# Altium PCB Mppt_PCB_Final.PcbDoc
Units mil, origin at the board's own origin, x right, y up, seen from the top; angles counter-clockwise.
Board outline 3025 x 2630 mil, 2 copper layers (Top Layer, Bottom Layer); 89 components, 51 nets, 307 pads, 52 vias.
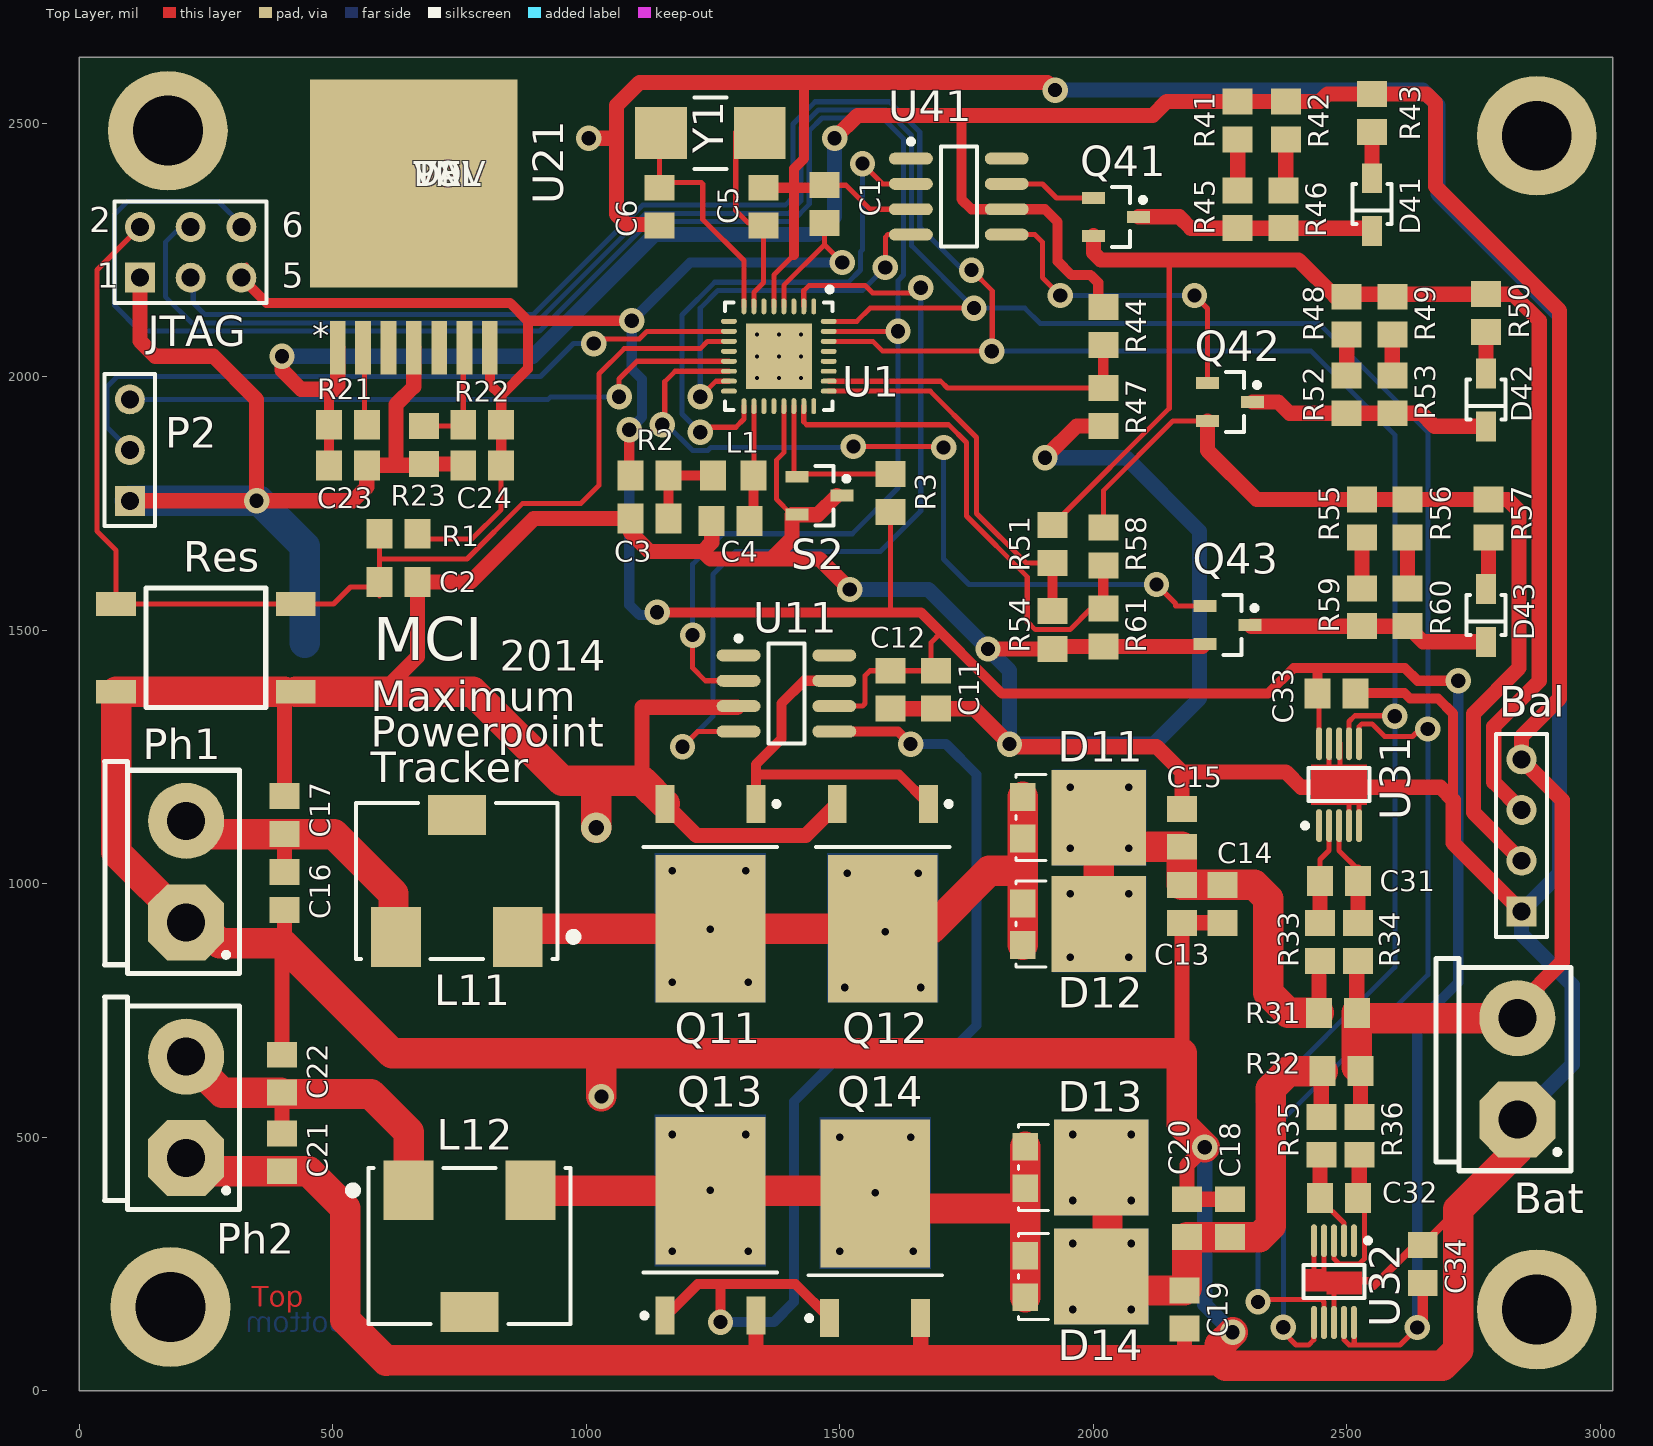
[diagram p0: Top Layer view]
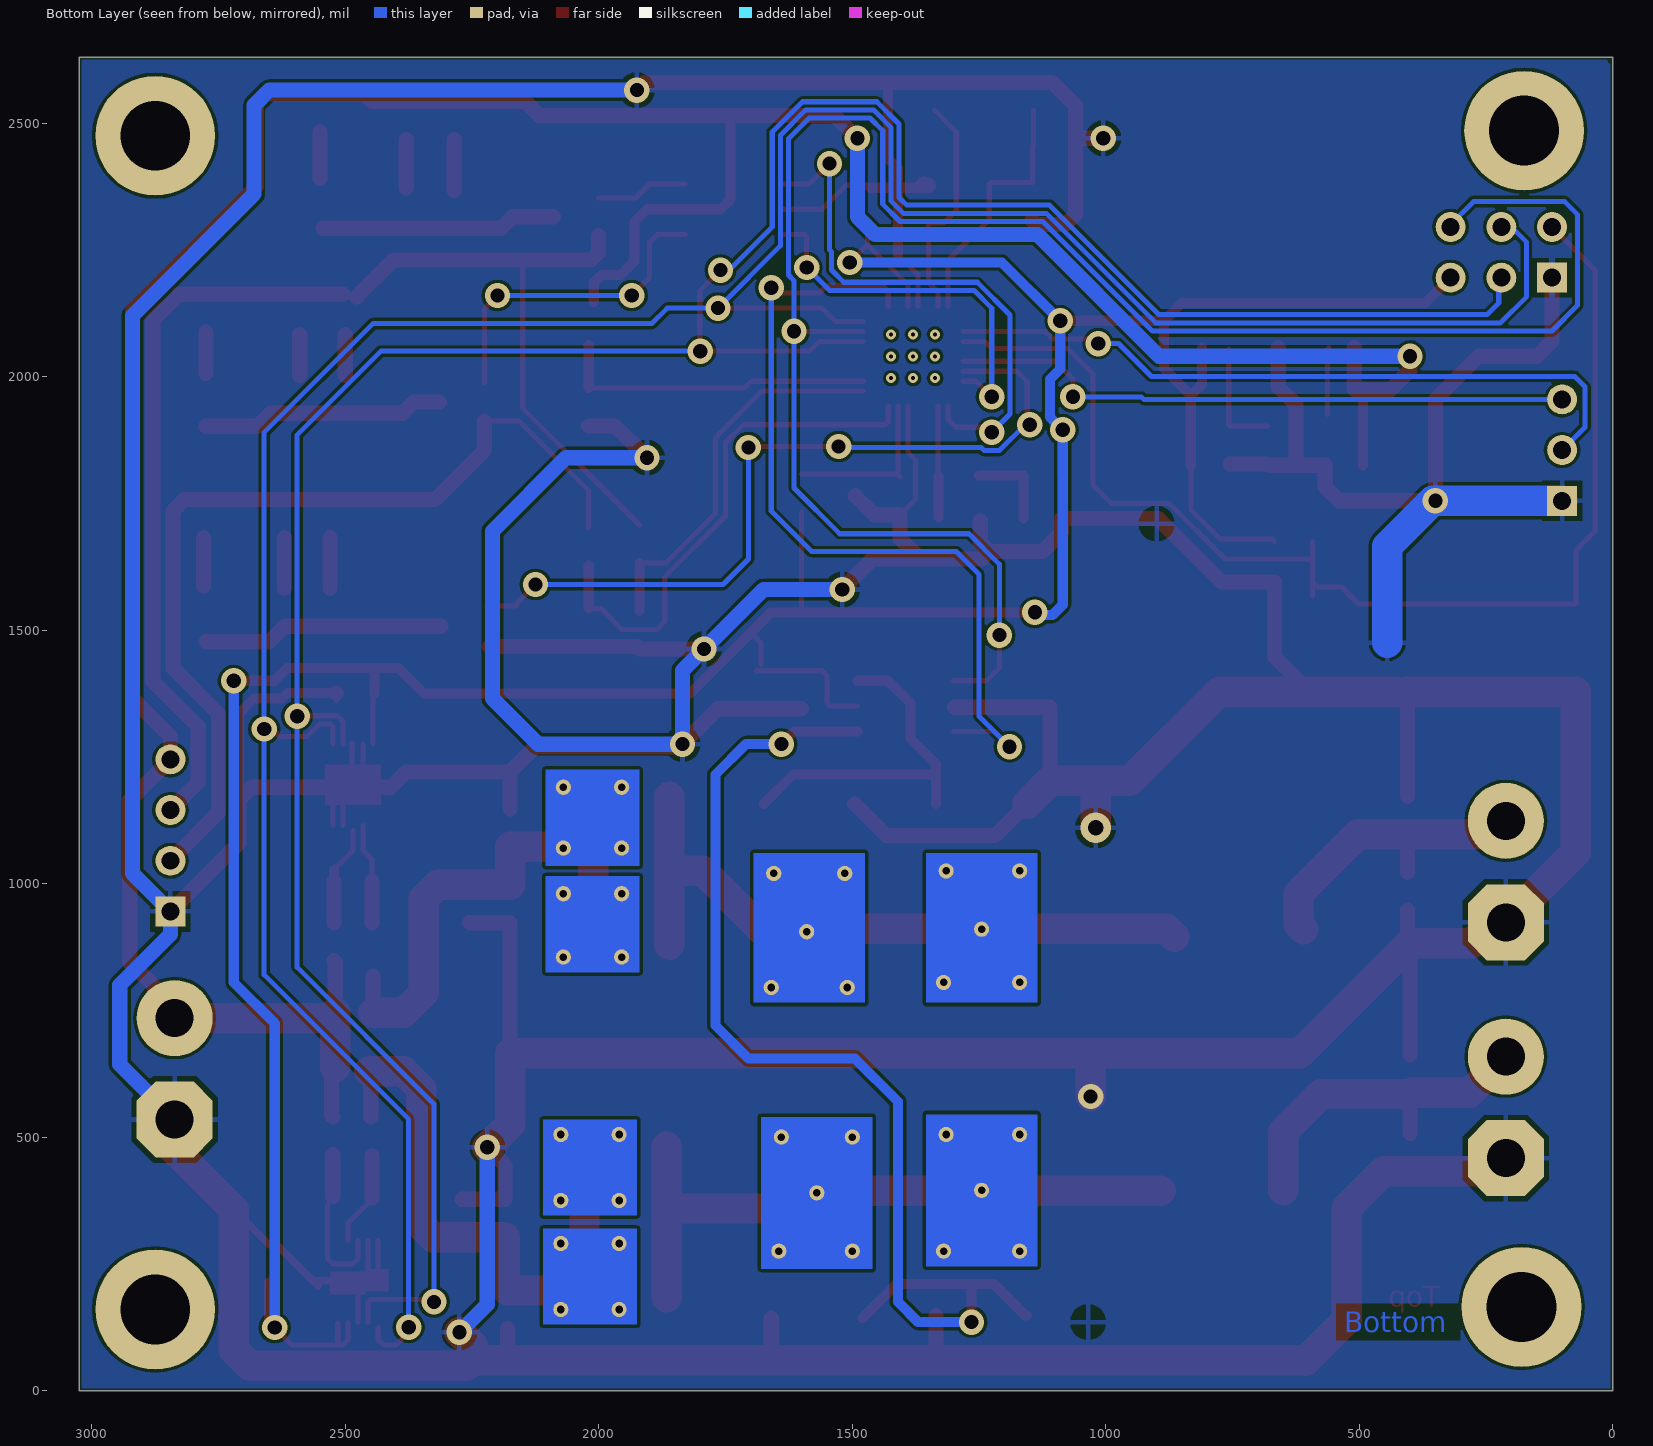
[diagram p1: Bottom Layer view, seen from below]
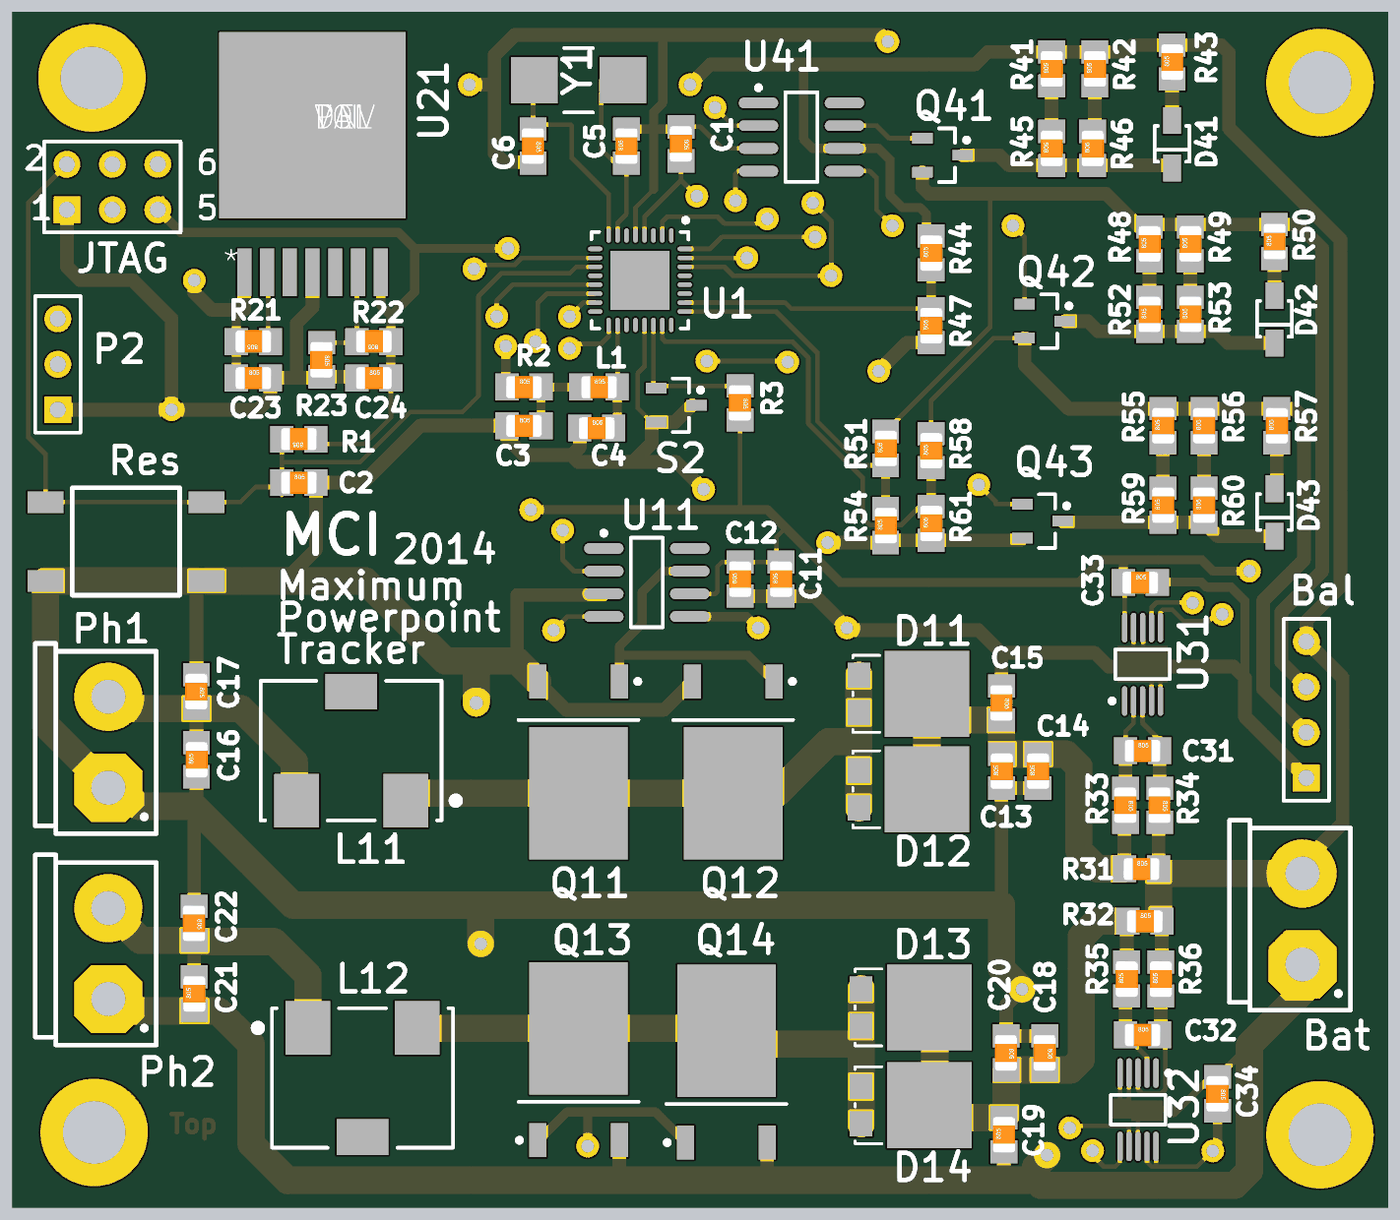
[diagram p2: 3D render of the assembled board from above, using the file's embedded part models]

## Layer stack, top to bottom
Top Solder: solder mask 0.4, Solder Resist, Dk 3.5
Top Layer: signal copper 1.4
Dielectric1: dielectric 12.6, FR-4, Dk 4.8
Bottom Layer: signal copper 1.4
Bottom Solder: solder mask 0.4, Solder Resist, Dk 3.5

## Board outline
0,0 3025,0 3025,2630 0,2630

## Design rules (kind name [scope] priority, off if disabled: settings)
Clearance Clearance_uC [InNetClass('uC')] p1: gap=6
Clearance [All] p2: gap=10
PolygonConnect [All] p1: connectstyle=Relief reliefconductorwidth=10 reliefentries=4 polygonreliefangle="90 Angle" airgapwidth=10
RoutingVias [All] p1: holewidth=28 width=50 viastyle="Through Hole" minholewidth=28 minwidth=50 maxholewidth=28 maxwidth=50
ShortCircuit ShortCircuit_GND [InNet('GND')] p1: allowed=TRUE
ShortCircuit [All] p2: allowed=FALSE
SolderMaskExpansion [All] p1: expansion=4
Width Width_uC [InNetClass('uC')] p1: maxlimit=60 minlimit=10 preferedwidth=10
Width Width_Power [InNetClass('Power')] p2: maxlimit=60 minlimit=30 preferedwidth=30
Width [All] p3: maxlimit=40 minlimit=10 preferedwidth=10
28 further rules are at their usual default settings.

## Classes and differential pairs
net class uC: +5V GND NetC2_1 NetC3_2 NetC4_2 NetC5_1 NetC6_1 NetC23_1 NetC31_1 NetC31_2 NetC32_1 NetC32_2 NetP1_3 NetP1_4 NetP1_6 NetP2_2 NetP2_3 NetQ41_1 NetQ42_1 NetQ43_1 NetR3_1 NetR44_1 NetR51_1 NetR58_1 NetU1_2 NetU1_15 NetU1_17 NetU31_1 NetU32_1
net class Power: GND NetC13_2 NetC16_2 NetC18_2 NetC21_2 NetC23_1 NetD11_A1 NetD13_A1
component class Mppt_Sheet1: C1 C2 C3 C4 C5 C6 JTAG L1 P2 R1 R2 R3 Res S2 U1 Y1
component class CurrentSensor: Bat C31 C32 C33 C34 R31 R32 R33 R34 R35 R36 U31 U32
component class Buck: C23 C24 R21 R22 R23 U21
component class Boost: C11 C12 C13 C14 C15 C16 C17 C18 C19 C20 C21 C22 D11 D12 D13 D14 L11 L12 Ph1 Ph2 Q11 Q12 Q13 Q14 U11
component class Balancer: Bal D41 D42 D43 Q41 Q42 Q43 R41 R42 R43 R44 R45 R46 R47 R48 R49 R50 R51 R52 R53 R54 R55 R56 R57 R58 R59 R60 R61 U41

## Components (designator, comment, footprint, x,y, rotation, side; value= is the part's Value field where it differs from the comment)
Bal "Header 4" HDR1X4 2845,945 r90 top (schematic designator P41)
Bat "WRTBL_2P_508" WRTBL_2P_508 2845,635 r90 top (schematic designator P31)
C1 "Cap_cer_100n_50V" _0805#1 1470,2340 r270 top
C2 "Cap_cer_10n_50V" _0805#1 630,1595 r0 top
C3 "Cap_cer_100n_50V" _0805#1 1125,1720 r0 top
C4 "Cap_cer_100n_50V" _0805#1 1285,1715 r0 top
C5 "Cap_cer_12p_50V" _0805#1 1350,2335 r90 top
C6 "Cap_cer_12p_50V" _0805#1 1145,2335 r270 top
C11 "Cap_cer_4.7u_50V" _0805#1 1690,1382.4 r90 top
C12 "Cap_cer_100n_50V" _0805#1 1600,1382.4 r90 top
C13 "" _0805#1 2175,960 r90 top
C14 "Cap_cer_22µ_25V" _0805#1 2255,960 r90 top
C15 "Cap_cer_100n_50V" _0805#1 2175,1110 r270 top
C16 "Cap_cer_22µ_25V" _0805#1 405,985 r90 top
C17 "Cap_cer_100n_50V" _0805#1 405,1135 r270 top
C18 "Cap_cer_22µ_25V" _0805#1 2270,340 r270 top
C19 "Cap_cer_22µ_25V" _0805#1 2180,160 r90 top
C20 "Cap_cer_100n_50V" _0805#1 2185,340 r270 top
C21 "Cap_cer_22µ_25V" _0805#1 400,470 r90 top
C22 "Cap_cer_100n_50V" _0805#1 400,625 r270 top
C23 "Cap_cer_10n_50V" _0805#1 530,1825 r0 top
C24 "Cap_cer_100n_50V" _0805#1 795,1825 r0 top
C31 "Cap_cer_100n_50V" _0805#1 2485,1005 r0 top
C32 "Cap_cer_100n_50V" _0805#1 2485,380 r0 top
C33 "Cap_cer_100n_50V" _0805#1 2480,1375 r0 top
C34 "Cap_cer_100n_50V" _0805#1 2650,250 r270 top
D11 "V10P45S" TO-277A 1970,1130 r270 top
D12 "V10P45S" TO-277A 1970,920 r270 top
D13 "V10P45S" TO-277A 1975,440 r270 top
D14 "V10P45S" TO-277A 1975,225 r270 top
D41 "LED_SMD" LED_SMD 2550,2340 r90 top
D42 "LED_SMD" LED_SMD 2775,1955 r90 top
D43 "LED_SMD" LED_SMD 2775,1530 r90 top
JTAG "Header 3X2" HDR2X3 120,2195 r0 top (schematic designator P1)
L1 "IND_47u_0A055" COIL_0805 1290,1805 r0 top
L11 "HCF1007" HCF1007 745,1005 r180 top
L12 "HCF1007" HCF1007 770,285 r0 top
P2 "Header 3" HDR1X3 100,1755 r90 top
Ph1 "WRTBL_2P_508" WRTBL_2P_508 219.49,1023.9 r90 top (schematic designator P11)
Ph2 "WRTBL_2P_508" WRTBL_2P_508 219.49,558.9 r90 top (schematic designator P12)
Q11 "IRFR024N" TO-252AA_N 1245,980 r270 top
Q12 "IRFR024N" TO-252AA_N 1585,980 r270 top
Q13 "IRFR024N" TO-252AA_N 1245,325 r90 top
Q14 "IRFR024N" TO-252AA_N 1570,320 r90 top
Q41 "NMOS-2" SOT23_N 2045,2315 r0 top
Q42 "NMOS-2" SOT23_N 2270,1950 r0 top
Q43 "NMOS-2" SOT23_N 2265,1510 r0 top
R1 "Res_0805" _0805#1 630,1690 r180 top
R2 "Res_0805" _0805#1 1125,1805 r0 top
R3 "Res_0805" _0805#1 1600,1770 r270 top
R21 "Res_0805" _0805#1 530,1905 r180 top
R22 "Res_0805" _0805#1 795,1905 r180 top
R23 "Res_0805" _0805#1 680,1865 r270 top
R31 "Res_0805" _0805#1 2482.6,745 r0 top
R32 "Res_0805" _0805#1 2490,630 r0 top
R33 "Res_0805" _0805#1 2447.6,885 r270 top
R34 "Res_0805" _0805#1 2522.6,885 r270 top
R35 "Res_0805" _0805#1 2450,502.6 r90 top
R36 "Res_0805" _0805#1 2525,502.6 r90 top
R41 "Res_0805" _0805#1 2285,2505 r90 top
R42 "Res_0805" _0805#1 2380,2505 r90 top
R43 "Res_0805" _0805#1 2550,2520 r90 top
R44 "Res_0805" _0805#2 2020,2100 r90 top
R45 "Res_0805" _0805#1 2285,2330 r90 top
R46 "Res_0805" _0805#1 2375,2330 r90 top
R47 "Res_0805" _0805#1 2020,1940 r90 top
R48 "Res_0805" _0805#1 2500,2120 r90 top
R49 "Res_0805" _0805#1 2590,2120 r90 top
R50 "Res_0805" _0805#1 2775,2125 r90 top
R51 "Res_0805" _0805#1 1920,1670 r90 top
R52 "Res_0805" _0805#1 2500,1965 r90 top
R53 "Res_0805" _0805#1 2590,1965 r90 top
R54 "Res_0805" _0805#1 1920,1500 r90 top
R55 "Res_0805" _0805#1 2530,1720 r90 top
R56 "Res_0805" _0805#1 2620,1720 r90 top
R57 "Res_0805" _0805#1 2780,1720 r90 top
R58 "Res_0805" _0805#1 2020,1665 r90 top
R59 "Res_0805" _0805#1 2530,1545 r90 top
R60 "Res_0805" _0805#1 2620,1545 r90 top
R61 "Res_0805" _0805#1 2020,1505 r90 top
Res "Reset" SWITCH_SMD 250,1465 r0 top (schematic designator S1)
S2 "ZRC400" SOT23_N 1460,1765 r0 top
U1 "ATtiny26L-8MU" 32M1-A_N 1380,2040 r270 top
U11 "MAX4427ESA" NSO8_N 1395,1375 r0 top
U21 "LMZ12001_NDW_7" TZA07A 660,2375 r0 top
U31 "MAX9611AUB+" MAXM-U10+2_N 2485,1195 r90 top
U32 "MAX9611AUB+" MAXM-U10+2_N 2475,215 r270 top
U41 "MAX4427ESA" NSO8_N 1735,2355 r0 top
Y1 "Crystal_16.0MHz" XTAL_SMD 1245,2480 r0 top

## Footprints (in the part's own frame and the unit in brackets; to place one, negate y for a bottom-side part, rotate by r counter-clockwise, add the part's x,y. Pads: shape width x height; smd on the part's side, far side on the other; paste and mask are expansions set on the pad)
32M1-A_N [mm] "QFN, 32-Leads, Body 5x5mm, Pitch 0.5mm, Thermal Pad 3.3x3.3mm, IPC Medium Density"
  oval 0.8x0.25 smd: 1(-2.5,1.75) 2(-2.5,1.25) 3(-2.5,0.75) 4(-2.5,0.25) 5(-2.5,-0.25) 6(-2.5,-0.75) 7(-2.5,-1.25) 8(-2.5,-1.75) 17(2.5,-1.75) 18(2.5,-1.25) 19(2.5,-0.75) 20(2.5,-0.25) 21(2.5,0.25) 22(2.5,0.75) 23(2.5,1.25) 24(2.5,1.75)
  oval 0.25x0.8 smd: 9(-1.75,-2.5) 10(-1.25,-2.5) 11(-0.75,-2.5) 12(-0.25,-2.5) 13(0.25,-2.5) 14(0.75,-2.5) 15(1.25,-2.5) 16(1.75,-2.5) 25(1.75,2.5) 26(1.25,2.5) 27(0.75,2.5) 28(0.25,2.5) 29(-0.25,2.5) 30(-0.75,2.5) 31(-1.25,2.5) 32(-1.75,2.5)
  rect 3.3x3.3 smd: 33(0,0)
  silkscreen extent -3.47,-2.7 2.7,2.7, body extent -2.55,-2.55 2.55,2.55, height 1
_0805#1 [mm]
  rect 1.3x1.5 smd: 1(-0.95,0) 2(0.95,0)
  body extent -1,-0.64 1,0.62, height 0.78
_0805#2 [mm]
  rect 1.3x1.5 smd: 1(-0.95,0)
  rect 1.295x1.499 smd: 2(0.95,0)
  body extent -1,-0.64 1,0.62, height 0.78
COIL_0805 [mm]
  rect 1.3x1.5 smd: 1(-1.014,0) 2(1.014,0)
  body extent -1,-0.64 1,0.62, height 0.78
HCF1007 [mm]
  rect 2.5x3 smd: 1(-3.05,2.8) 2(3.05,2.8)
  rect 2.9x2 smd: ""(0,-3.3)
  silkscreen extent -6.04,-3.9 5.05,3.9
HDR1X3 [mm] "Connector; Header; 3 Position"
  rect 1.5x1.5 hole 0.9: 1(0,0)
  round 1.5 hole 0.9: 2(2.54,0) 3(5.08,0)
  silkscreen extent -1.27,-1.27 6.35,1.27, body extent -0.3,-0.29 5.38,0.3, height 7
HDR1X4 [mm] "Connector; Header; 4 Position"
  rect 1.5x1.5 hole 0.9: 1(0,0)
  round 1.5 hole 0.9: 2(2.54,0) 3(5.08,0) 4(7.62,0)
  silkscreen extent -1.27,-1.27 8.89,1.27, body extent -0.3,-0.29 7.92,0.3, height 7
HDR2X3 [mm] "Connector; Header; 3x2 Position"
  rect 1.5x1.5 hole 0.9: 1(0,0)
  round 1.5 hole 0.9: 2(0,2.54) 3(2.54,0) 4(2.54,2.54) 5(5.08,0) 6(5.08,2.54)
  silkscreen extent -1.27,-1.27 6.35,3.81, body extent -0.3,-0.29 5.38,2.84, height 7
LED_SMD [mm]
  rect 1.5x1 smd: 1(1.298,0) 2(-1.349,0)
  silkscreen extent -1,-0.98 1,0.98, body extent -1.12,-0.85 1.23,0.85, height 1.3
MAXM-U10+2_N [mm] "SOP, 10-Leads, Body 3x3mm, Pitch 0.5mm, IPC Medium Density"
  oval 1.65x0.3 smd: 1(-2.05,1) 2(-2.05,0.5) 3(-2.05,0) 4(-2.05,-0.5) 5(-2.05,-1) 6(2.05,-1) 7(2.05,-0.5) 8(2.05,0) 9(2.05,0.5) 10(2.05,1)
  silkscreen extent -2.17,-1.53 0.82,1.82, body extent -1.55,-1.55 1.55,1.55, height 1.1
NSO8_N [mm] "SOIC, 8-Leads, Body 4.9x3.9mm, Pitch 1.27mm, IPC Medium Density"
  oval 2.2x0.6 smd: 1(-2.4,1.905) 2(-2.4,0.635) 3(-2.4,-0.635) 4(-2.4,-1.905) 5(2.4,-1.905) 6(2.4,-0.635) 7(2.4,0.635) 8(2.4,1.905)
  silkscreen extent -2.52,-2.5 0.9,2.88, body extent -2,-2.5 2,2.5, height 1.75
SOT23_N [mm] "SOT23, 3-Leads, Body 2.9x1.3mm, Pitch 0.95mm, Lead Span 2.3mm - Reverse Pinning, IPC Medium Density"
  rect 1.15x0.6 smd: 1(1.125,0) 2(-1.125,-0.95) 3(-1.125,0.95)
  silkscreen extent -0.2,-1.5 1.48,1.5, body extent -0.7,-1.5 0.7,1.5, height 1.1
SWITCH_SMD [mm]
  rect 2x1.2 smd: 1(-4.5,2.2) 1(4.5,2.2) 2(-4.5,-2.2) 2(4.5,-2.2)
  silkscreen extent -3,-3 3,3, body extent -5.02,-3 5.02,2.95, height 5
TO-252AA_N [mm] "D-PAK, 4-Leads, Body 6.1x6.5mm, Pitch 2.28mm, Lead Span 9.9mm, IPC Medium Density"
  rect 1.9x0.95 smd: 1(-4.5,2.28) 3(-4.5,-2.28)
  rect 7.4x5.5 smd: 4(1.75,0)
  silkscreen extent -4.62,-3.35 -2.35,3.43, body extent -2.25,-3.37 4.1,3.37, height 2.38
TO-277A [mm]
  rect 1.4x1.27 smd: 1(1.04,-2.765) 2(-1.04,-2.765)
  rect 4.8x4.72 smd: K(0,1.04)
  silkscreen extent -2.15,-3.1 2.15,-1.6
TZA07A [mil]
  rect 31x105 smd: 1(-150,-318) 2(-100,-318) 3(-50,-318) 4(0,-318) 5(50,-318) 6(100,-318) 7(150,-318)
  rect 410x410 smd: 8(0,6)
WRTBL_2P_508 [mil]
  oct 150x150 hole 75: 1(-100.37,8.33)
  round 150 hole 75: 2(99.63,8.33)
  silkscreen extent -201,-97 217,169, body extent -190,-95 205,168, height 550
XTAL_SMD [mm]
  rect 2.6x2.6 smd: 1(-2.476,0) 2(2.476,0)
  silkscreen extent -0.8,-1.8 0.8,1.8, body extent -2.4,-1.8 2.4,1.8, height 1.4

## Part data
Bal: library part Con_33
Bat Ph1 Ph2: library part Con_7
C1 C3 C4 C11 C12 C13 C14 C15 C16 C17 C18 C19 C20 C21 C22 C24 C33 C34: library part Cap_124
C2 C23 C31 C32: library part Cap_120
C5 C6: library part Cap_109
D11 D12 D13 D14: "V01P45 Shottky Diode"
D41 D42 D43: library part DIODE_48
JTAG: library part Con_41
L1: library part Ind_41, "Inductor"
L11 L12: "HCF1007 Inductor"
P2: library part Con_32
Q11 Q12 Q13 Q14: "HEXFET N-Channel Power MOSFET"
Q41 Q42 Q43: "N-Channel Power MOSFET"
R1 R2 R3 R21 R22 R23 R31 R32 R33 R34 R35 R36 R41 R42 R43 R44 R45 R46 R47 R48 R49 R50 R51 R52 R53 R54 R55 R56 R57 R58 R59 R60 R61: library part Res_6
Res: library part Misc_11
S2: library part Misc_1, "4,096V Voltage Regulator"
U1: "8-bit AVR Microcontroller, 2.7-5.5V, 8MHz, 2KB Flash, 128 Bytes EEPROM, 128 Bytes SRAM, 32-pin MLF, Industrial Grade (-40°C to 85°C), Pb-Free"
U11 U41: "Dual High-Speed 1.5A MOSFET Driver"
U21: "Imported"
U31 U32: "High-side Current-Sense Amplifier with 12-bit I2C ADC and Op Amp / Comparator - Non-inverting, Adjustable Gain, -40 to 125 degC, 10-Pin SOP (U10+2), Pb-Free"
Y1: library part Crystal_19

## Free pads (board coordinates)
  round 60 hole 30: 0(1020,1110)
  round 30 hole 15: 0(1170,275) 0(1170,505) 0(1170,805) 0(1170,1025) 0(1245,395) 0(1245,910) 0(1315,505) 0(1315,1025) 0(1320,275) 0(1320,805) 0(1500,275) 0(1500,500) 0(1510,795) 0(1515,1020) 0(1570,390) 0(1590,905) 0(1640,500) 0(1645,275) 0(1655,1020) 0(1660,795) 0(1955,855) 0(1955,980) 0(1955,1070) 0(1955,1190) 0(1960,160) 0(1960,290) 0(1960,375) 0(1960,505) 0(2070,855) 0(2070,980) 0(2070,1070) 0(2070,1190) 0(2075,160) 0(2075,290) 0(2075,375) 0(2075,505)
  round 236.22 hole 137.8: 1(175,2485) 1(180,165) 1(2875,160) 1(2875,2475)

## Via types
v1: diameter 50, hole 28, Top Layer to Bottom Layer, 43 vias
v2: diameter 19.68, hole 7.87, Top Layer to Bottom Layer, 9 vias

## Nets (pads, with @x,y where several pads share a name; then routed paths per layer and width w, separated by ;. In a path a pad name is that pad's centre, name@x,y a point inside that pad or via, vN(x,y) a via of type N, cw(c..) or ccw(c..) an arc to the next point about the centre after c; other vN are vias at no path point)
+5V: C1.2 C11.2 C12.2 C24.2 C33.1 C34.2 JTAG.5 R1.1 R2.1 R3.2 R22.1 U1.4 U11.6 U21.7 U31.10 U32.9 U32.10 | length 6963.4
  Top Layer w10: JTAG.5@330,2185 JTAG.5@330,2220 ; R1.1@667.4,1675 672.4,1680 775,1680 832.4,1737.4 C24.2 ; U1.4 1389.84,2179.84 1470,2260 ; C1.2 1470,2260 ; U11.6 1545,1350 1550,1355 1550,1410 1559.8,1419.8 C12.2 C11.2 ; v1@1515,2215 1470,2260 ; 1600,1535 R3.2 ; C11.2@1680,1432.4 1680,1475 1700,1495 ; U31.10 C33.1@2445.63,1371.97 ; U32.9 2494.69,100.31 2505,90 2515,90 ; U32.10@2515,133.66 2515,90 ; v1@2650,135 v1(2639.29,124.29) 2605,90 2515,90
  Top Layer w20: JTAG.5@330,2185 370,2145 850,2145 885,2110 ; U21.7 810,1985 832.4,1962.6 ; C24.2 R22.1 832.4,1962.6 ; R2.1@1085,1807.6 v1(1085,1895) ; v1@1087.6,2110 885,2110 ; v1(1140,1535) 1600,1535 1660,1535 1820,1375 2345,1375 2395,1425 2615,1425 2640,1400 v1(2720,1400) ; C33.1 2442.6,1422.4 ; v1@2650,135 C34.2 ; 832.4,1962.6 885,2015.2 885,2110
  Bottom Layer w20: v1@1140,1530 1105,1530 1085,1550 v1(1085,1895) 1110,1920 1110,1995 1090,2015 v1(1090,2110) 1205,2225 1495,2225 v1@1505,2215 ; v1(2639.29,124.29) 2639.29,724.29 2720,805 v1(2720,1400)
  other v1: 1505,2225
GND: Bal.1 Bat.1 C1.1 C2.2 C3.1 C4.1 C5.2 C6.2 C11.1 C12.1 C13.1 C14.1 C15.1 C16.1 C17.1 C18.1 C19.1 C20.1 C21.1 C22.1 C23.2 C24.1 C33.2 C34.1 JTAG.1 P2.1 pad.0@1020,1110 Ph1.1 Ph2.1 Q11.3 Q12.3 Q13.3 Q14.3 Q43.2 R23.2 R47.1 R54.1 R61.1 Res.2 S2.1 S2.2 U1.5 U1.21 U11.3 U21.4 U31.4 U31.5 U31.8 U31.9 U32.4 U32.5 U32.8 U41.3 | length 23540.6
  Top Layer w10: U1.5 1370.16,2200.16 1410,2240 ; U1.21 1389.84,1849.84 1375,1835 1375,1758.31 S2.2@1405.71,1727.6 ; C1.1 1512.6,2377.4 1560,2330 U41.3 ; 2435.63,240 U32.5 ; 2455.32,240 U32.4 ; 2465.31,1190.31 U31.9 ; U32.8 2475,191.26 ; U31.8 2486.42,1277.13 2486.42,1200 ; U31.4 2504.69,1189.69 ; C33.2@2517.4,1360 C33.2 ; U31.5 2524.37,1184.37
  Top Layer w15: 2501.26,216.26 2553.74,216.26 ; 2553.74,206.26 C34.1@2634.88,287.4 ; C34.1 2720,357.4
  Top Layer w20: C5.2 1410,2372.4 ; 1410,2240 1410,2372.4 ; 1430,2580 1430,2430 1410,2410 1410,2372.4 ; C1.1@1465,2372.4 1410,2372.4 ; C33.2@2518.4,1376 2614.05,1376 2625.05,1365 2680,1365 2710,1335 2710,1165
  Top Layer w30: P2.1 v1(350,1755) ; JTAG.1 120,2070 150,2040 265,2040 350,1955 v1(350,1755) ; C22.1 400,882.6 ; 405,887.6 C16.1 ; C17.1 Res.2@405,1356.22 ; 598.39,1378.39 667.4,1447.4 C2.2 771.77,1595 896.77,1720 C3.1 1087.6,1692.4 1125,1655 1230,1655 ; U21.4 660,1980 625,1945 625,1825 ; R23.2@677.4,1825 625,1825 ; R23.2 C24.1@755,1827.6 ; v1(1005,2470) 1060,2470 ; 1110,1202.4 1110,1347.6 U11.3@1298.11,1347.6 ; C6.2@1145,2307.6 1137.4,2300 1080,2300 1060,2320 1060,2470 ; Q11.3 1217.4,1095 1433.07,1095 Q12.3 ; C4.1 1247.6,1672.6 1230,1655 ; 1334.76,64.76 Q13.3 ; C5.2@1350,2377.4 1357.4,2377.4 C5.2@1360,2380 ; S2.1@1494.29,1765 1456.89,1727.6 1405.71,1727.6 1405.71,1680.71 1365,1640 ; v1(1520,1580) 1460,1640 1365,1640 ; C12.1 C11.1 1765,1345 v1(1835,1275) 1840,1270 2125,1270 2175,1220 ; 1659.76,64.76 Q14.3 ; v1(1792.6,1462.6) R54.1 1925,1467.6 R61.1 Q43.2@2215.71,1467.6 ; v1(1905,1840) 1967.6,1902.6 R47.1 ; v1(1925,2565) 1910,2580 1105,2580 1060,2535 1060,2470 ; 2175,665 C13.1 C14.1 ; C15.1 2175,1220 ; 2180,60 C19.1 ; v1(2220,480) 2185,445 C20.1 C18.1 ; 2465.31,1190.31 2465,1190 ; C33.2 C33.2@2518.4,1376 ; Bat.1@2836.67,474.07 Bat.1 ; Bal.1 2710,1080 2710,1165 2685,1190 2465,1190 ; v1(350,1755) 540,1755 567.4,1782.4 C23.2 625,1825 ; 1230,1655 1245,1640 1365,1640 ; 2175,1220 2380,1220 2410,1190 2465,1190
  Top Layer w60: Ph1.1 72.83,1061.85 72.83,1378.39 Res.2@405,1378.39 ; Ph1.1@230,930 277.4,882.6 400,882.6 617.6,665 1030,665 ; Ph2.1@237.09,432.6 C21.1 452.4,432.6 525,360 525,140 606,59 ; Res.2@427.16,1378.39 598.39,1378.39 776.61,1378.39 952.6,1202.4 1020,1202.4 ; 607,60 2180,60 2250,60 2250,90 v1(2275,115) ; pad.0@1020,1110 1020,1202.4 ; v1(1030,580) 1030,665 ; Q11.3 1110,1202.4 1020,1202.4 ; v1(2220,480) 2175,525 2175,665 1030,665 ; 2260,50.2 2261.2,49 2689,49 2720,80 2720,357.4 Bat.1@2836.67,474.07
  Bottom Layer w30: JTAG.1@115,2190.26 JTAG.1@119.95,2195.21 ; v1(1520,1580) 1675.2,1580 v1(1792.6,1462.6) 1835,1420.2 v1(1835,1275) 2120,1275 2210,1365 2210,1695 2065,1840 v1(1905,1840) ; v1(1925,2565) 2650,2565 2680,2535 2680,2360 2920,2120 2920,1020 Bal.1 2845,900 2945,800 2945,642.96 Bat.1 ; v1(2220,480) 2220,170 v1(2275,115)
  Bottom Layer w60: P2.1 v1(350,1755) 355,1755 445,1665 445,1475
NetC2_1: C2.1 JTAG.2 R1.2 Res.1 U1.11 | length 2435.4
  Top Layer w10: JTAG.2 35,2210 35,1695 72.83,1657.17 72.83,1551.61 427.16,1551.61 501.61,1551.61 535,1585 582.6,1585 C2.1 ; C2.1@592.6,1567.4 C2.1 ; R1.2@592.6,1675 592.6,1640 ; U1.11 1239.53,2069.53 1225,2055 1075,2055 1025,2005 1025,1785 990,1750 875,1750 765,1640 592.6,1640 ; C2.1 592.6,1640
NetC3_2: C3.2 L1.1 R2.2 | length 172.7
  Top Layer w20: C3.2 R2.2 L1.1
NetC4_2: C4.2 L1.2 U1.18 | length 218.2
  Top Layer w10: L1.2@1330.79,1805.89 U1.18
  Top Layer w20: C4.2@1329.9,1722.5 L1.2
NetC5_1: C5.1 U1.7 Y1.2 | length 452.5
  Top Layer w10: U1.7 1330.79,2166 1350,2185.21 1350,2302.6 1320,2302.6 1295,2327.6 1295,2482.52 Y1.2@1337.48,2525
NetC6_1: C6.1 U1.8 Y1.1 | length 504.8
  Top Layer w10: Y1.1@1142.52,2525 1142.52,2456.48 1145,2454 1145,2382.4 1227.6,2382.4 1230,2380 1230,2310 1311.1,2228.9 U1.8
NetC13_2: C13.2 C14.2 C15.2 D11.K D12.K pad.0@1955,855 pad.0@1955,980 pad.0@1955,1070 pad.0@1955,1190 pad.0@2070,855 pad.0@2070,980 pad.0@2070,1070 pad.0@2070,1190 R31.1 R33.2 | length 1028.4
  Top Layer w30: D11.K D11.K@2068.35,1072.6 ; R31.1 2445.2,817.22
  Top Layer w60: D12.K D11.K ; D11.K@2068.35,1072.6 C15.2 C13.2 C14.2 2317.6,997.4 2345,970 2345,785 2385,745 R31.1
NetC16_2: C16.2 C17.2 L11.2 Ph1.2 | length 618.2
  Top Layer w30: Ph1.2 Ph1.2@237.09,1097.6 ; C16.2 C17.2
  Top Layer w60: Ph1.2@237.09,1097.6 C17.2 502.6,1097.6 620,980.2 620,919.29 L11.2@610.2,909.49
NetC18_2: C18.2 C19.2 C20.2 D13.K D14.K pad.0@1960,160 pad.0@1960,290 pad.0@1960,375 pad.0@1960,505 pad.0@2075,160 pad.0@2075,290 pad.0@2075,375 pad.0@2075,505 R32.1 R35.2 | length 1095.8
  Top Layer w30: R35.2 R32.1@2450,627.4
  Top Layer w60: D14.K@2023.35,197.4 C19.2 ; D14.K@2028.35,237.4 D13.K@2028.35,427.6 ; C19.2@2185,202.4 C20.2 C18.2 2327.6,302.6 2350,325 2350,595 2385,630 R32.1
NetC21_2: C21.2 C22.2 L12.1 Ph2.2 | length 692.7
  Top Layer w30: C21.2 C22.2@400,585
  Top Layer w60: Ph2.2 282.09,587.6 397.4,587.6 400,585 575,585 649.92,510.08 L12.1
NetC23_1: Bal.4 Bat.2 C23.1 R21.2 R31.2 R32.2 R34.2 R36.2 R41.2 R42.2 R43.2 R44.2 U21.1 U41.6 | length 6187.4
  Top Layer w20: C23.1 R21.2 492.6,1972.4 ; 1740,2515 1740,2350 1760,2330 U41.6 1905,2330 1930,2305 1930,2227.4 1957.4,2200 1995,2200 2010,2185 R44.2@2010,2147.4
  Top Layer w30: v1(400,2040) 400,2012.6 437.6,1975 510,1975 U21.1 ; v1(1490,2470) 1535,2515 1740,2515 2117.6,2515 2145,2542.4 R41.2 R42.2 2447.4,2542.4 2462.4,2557.4 R43.2 2657.6,2557.4 2675,2540 2675,2375 2920,2130 2920,1365 2845,1290 Bal.4 2925,1165 2925,845 2836.67,756.67 Bat.2 ; R32.2@2520,637.4 R32.2 2527.4,542.4 R36.2 ; R34.2 2520,845 R31.2 R31.2@2530.37,734.63
  Top Layer w60: R32.2@2520,637.4 R31.2 ; R31.2@2530.37,734.63 Bat.2
  Bottom Layer w30: v1(400,2040) 895,2040 1135,2280 1455,2280 1490,2315 v1@1490,2460
NetC31_1: C31.1 R33.1 U31.2 | length 199.2
  Top Layer w10: C31.1 2447.6,1047.6 2465.31,1065.31 U31.2
  Top Layer w30: R33.1 C31.1
NetC31_2: C31.2 R34.1 U31.3 | length 197.9
  Top Layer w10: U31.3@2485,1105 2485,1065 C31.2@2522.4,1027.6
  Top Layer w20: C31.2 C31.2@2522.4,1027.6
  Top Layer w30: R34.1@2522.4,922.6 C31.2
NetC32_1: C32.1 R35.1 U32.2 | length 186.6
  Top Layer w10: C32.1 2447.6,377.4 2494.69,330.31 U32.2
  Top Layer w30: C32.1 R35.1@2447.6,462.79
NetC32_2: C32.2 R36.1 U32.3 | length 311.8
  Top Layer w10: U32.3 2475,260 2485,250 2525,250 2535,260 2535,367.4 C32.2
  Top Layer w30: C32.2@2525,382.6 R36.1
NetD11_A1: D11.1 D11.2 D12.1 D12.2 L11.1 pad.0@1170,805 pad.0@1170,1025 pad.0@1245,910 pad.0@1315,1025 pad.0@1320,805 pad.0@1510,795 pad.0@1515,1020 pad.0@1590,905 pad.0@1655,1020 pad.0@1660,795 Q11.4 Q12.4 | length 1341.9
  Top Layer w30: Q12.4 Q12.4@1681.1,911.1
  Top Layer w60: L11.1 881.42,911.1 Q11.4 Q12.4 ; Q12.4@1681.1,911.1 1795,1025 1861.14,1025 ; D12.1 D12.2 1861.14,1025 ; D11.2 D11.1 1861.14,1025
NetD13_A1: D13.1 D13.2 D14.1 D14.2 L12.2 pad.0@1170,275 pad.0@1170,505 pad.0@1245,395 pad.0@1315,505 pad.0@1320,275 pad.0@1500,275 pad.0@1500,500 pad.0@1570,390 pad.0@1640,500 pad.0@1645,275 Q13.4 Q14.4 | length 1281
  Top Layer w30: Q14.4@1565,393.9 Q14.4 Q14.4@1599.84,359.06
  Top Layer w60: L12.2@891.42,393.9 Q13.4 Q14.4@1565,393.9 ; Q14.4@1599.84,359.06 1861.14,359.06 ; D14.1 D14.2 D13.1 D13.2
NetD41_1: D41.1 R43.1 | length 91.5
  Top Layer w30: D41.1 R43.1
NetD41_2: D41.2 Q41.1 R45.1 R46.1 | length 464.3
  Top Layer w30: Q41.1 2170,2315 2192.4,2292.6 R45.1 R46.1 D41.2@2544.28,2292.6
NetD42_1: D42.1 R50.1 | length 81.5
  Top Layer w30: D42.1 R50.1
NetD42_2: D42.2 Q42.1 R52.1 R53.1 | length 480.6
  Top Layer w30: Q42.1 2365,1950 2387.4,1927.6 R52.1 R53.1 2647.4,1927.6 2673.12,1901.88 D42.2
NetD43_1: D43.1 R57.1 | length 96.5
  Top Layer w30: D43.1@2780,1586.12 R57.1
NetD43_2: D43.2 Q43.1 R59.1 R60.1 | length 476
  Top Layer w30: Q43.1@2311.69,1507.6 R59.1 R60.1 2650.72,1476.88 D43.2
NetP1_3: JTAG.3 U1.30 U31.7 U32.7 | length 5607.3
  Top Layer w10: U1.30 1565.47,2069.53 1585,2050 v1(1800,2050) 1801,2051 1801,2169 v1(1760,2210) ; v1(2325,175) 2330,180 2450,180 2455.32,174.68 U32.7 ; U31.7 2504.69,1319.69 2516,1331 2594,1331 v1(2595,1330)
  Bottom Layer w10: JTAG.3@225,2195 225,2145 248,2122 894.98,2122 1110.98,2338 1392.75,2338 1408,2353.25 1408,2498.25 1451.75,2542 1598.25,2542 1658,2482.25 1658,2295 1743,2210 v1(1760,2210) ; v1(1800,2050) 2430,2050 2595,1885 v1(2595,1330) 2595,835 2325,565 v1(2325,175)
NetP1_4: JTAG.4 U1.32 U31.6 U32.6 | length 5816.1
  Top Layer w10: U1.32 1533.9,2108.9 1560,2135 v1(1765,2135) ; v1@2375,135 2375,115 2400,90 2425,90 2435,100 2435,123.66 U32.6@2435.63,124.29 ; U31.6 2524.37,1309.37 2530,1315 2550,1315 2575,1290 2630,1290 2645,1305 v1@2650,1300
  Bottom Layer w10: JTAG.4@225,2320 170,2265 170,2157.63 221.63,2106 901.6,2106 1117.6,2322 1399.37,2322 1424,2346.63 1424,2491.63 1458.37,2526 1591.63,2526 1642,2475.63 1642,2258 v1(1765,2135) 1865,2135 1895,2105 2445,2105 2660,1890 v1(2660,1305) 2660,820 2375,535 v1@2375,135
  other v1: 2375,125
NetP1_6: JTAG.6 U1.31 U11.2 | length 3917.4
  Top Layer w10: v1(1210,1490) 1210,1425 1235,1400 U11.2 ; U1.31 v1(1615,2089.21)
  Bottom Layer w10: JTAG.6@322.5,2297.5 275,2345 95,2345 70,2320 70,2140 120,2090 908.23,2090 1124.23,2306 1406,2306 1440,2340 1440,2485 1465,2510 1585,2510 1626,2469 1626,2200.09 1615,2189.09 v1(1615,2089.21) 1615,1780 1525,1690 1270,1690 1210,1630 1210,1505 v1@1200,1495
NetP2_2: P2.2 U1.10 | length 1415.5
  Top Layer w10: v1(1015,2065) 1024,2074 1104.91,2074 1120.12,2089.21 U1.10
  Bottom Layer w10: P2.2 55,1900 55,1980 75,2000 910,2000 975,2065 v1(1015,2065)
NetP2_3: P2.3 U1.13 | length 1250.6
  Top Layer w10: v1@1080,1960 1065,1975 1065,1995 1100.16,2030.16 U1.13
  Bottom Layer w10: P2.3 925,1955 930,1960 1055,1960 v1@1070,1945
  other v1: 1065,1960
NetP41_2: Bal.2 Q42.2 R55.2 R56.2 R57.2 R58.2 | length 1823.9
  Top Layer w10: R58.2 2020,1775 2157.6,1912.6 Q42.2
  Top Layer w30: Q42.2 2225.71,1854.29 2322.6,1757.4 R55.2 R56.2 R57.2 2817.6,1757.4 2840,1735 2840,1425 2750,1335 2750,1140 Bal.2
NetP41_3: Bal.3 Q41.2 R48.2 R49.2 R50.2 R51.2 | length 2608.2
  Top Layer w10: R51.2 2150,1937.4 2150,2230 ; R48.2@2477.6,2157.4 R48.2
  Top Layer w30: Q41.2 2000.71,2244.29 2015,2230 2150,2230 2405,2230 R48.2@2477.6,2157.4 ; R48.2@2505,2162.4 R50.2 2827.6,2162.4 2880,2110 2880,1400 2790,1310 2790,1200 Bal.3
NetQ11_1: Q11.1 Q12.1 U11.7 | length 705.7
  Top Layer w20: Q11.1 1334.76,1215 ; U11.7 1430,1400 1385,1355 1385,1285 1334.76,1234.76 1334.76,1215 ; Q12.1 1616.93,1215 1334.76,1215
NetQ13_1: Q13.1 Q14.1 U11.5 | length 2243
  Top Layer w20: Q13.1 1157.83,147.83 1220,210 1265,210 ; v1(1265,135) 1265,210 ; Q14.1 1413.07,210 1265,210 ; U11.5 1615,1300 v1(1640,1275)
  Bottom Layer w20: v1(1265,135) 1370,135 1410,175 1410,570 1495,655 1705,655 1770,720 1770,1215 1710,1275 v1(1640,1275)
NetQ41_1: Q41.3 U41.7 | length 182.7
  Top Layer w10: U41.7 1900,2380 1927.6,2352.4 Q41.3
NetQ42_1: Q42.3 U41.5 | length 644.5
  Top Layer w10: U41.5 1885,2280 1900,2265 1900,2195 v1(1935,2160) ; v1(2200,2160) 2225.71,2134.29 Q42.3
  Bottom Layer w10: v1(1935,2160) v1(2200,2160)
NetQ43_1: Q43.3 U1.14 | length 1597.9
  Top Layer w10: v1@1155,1915 1155,1990 1175.47,2010.47 U1.14 ; v1(1527,1862) 1703,1862 v1(1705,1860) ; v1(2125,1590) 2162.4,1552.6 2162.4,1547.4 Q43.3
  Bottom Layer w10: v1@1160,1895 v1(1150,1905) 1159.09,1905 1210.09,1854 1239.91,1854 1245.91,1860 1525,1860 v1(1527,1862) v1@1535,1870 ; v1(1705,1860) 1705,1640 1755,1590 v1@2130,1590
NetR3_1: R3.1 S2.3 U1.22 | length 330
  Top Layer w10: S2.3@1405.71,1802.4 1409.53,1806.22 U1.22 ; S2.3@1410.71,1807.4 R3.1
NetR21_1: R21.1 U21.2 | length 133
  Top Layer w10: U21.2 562.4,2054.6 R21.1@562.4,1925
NetR22_2: R22.2 R23.1 U21.6 | length 228.3
  Top Layer w10: R23.1 755,1902.4 R22.2 U21.6@757.6,2054.6
NetR41_1: R41.1 R45.2 | length 100.2
  Top Layer w30: R45.2 R41.1
NetR42_1: R42.1 R46.2 | length 95.2
  Top Layer w30: R46.2@2380,2372.4 R42.1
NetR44_1: R44.1 R47.2 U1.26 | length 632.3
  Top Layer w10: U1.26 1699.21,1990.79 1712.6,1977.4 R47.2
  Top Layer w20: R47.2 R44.1
NetR48_1: R48.1 R52.2 | length 80.2
  Top Layer w30: R52.2 R48.1
NetR49_1: R49.1 R53.2 | length 80.2
  Top Layer w30: R53.2 R49.1
NetR51_1: R51.1 R54.2 U1.25 | length 764.9
  Top Layer w10: U1.25 1678.9,1971.1 1770,1880 1770,1730 1867.4,1632.6 R51.1
  Top Layer w20: R54.2 R51.1
NetR55_1: R55.1 R59.2 | length 100.2
  Top Layer w30: R59.2 R55.1
NetR56_1: R56.1 R60.2 | length 100.2
  Top Layer w30: R60.2 R56.1
NetR58_1: R58.1 R61.2 U1.23 | length 1030.5
  Top Layer w10: U1.23 1429.21,1910.79 1435,1905 1715,1905 1750,1870 1750,1725 1870,1605 1870,1516.73 1885.92,1500.81 1954.08,1500.81 1995.67,1542.4 R61.2
  Top Layer w20: R61.2 R58.1
NetU1_2: U1.2 U11.4 | length 1661.8
  Top Layer w10: v1(1190,1270) 1220,1300 U11.4 ; U1.2 1429.21,2169.21 1440,2180 1550,2180 1565,2165 v1@1660,2165
  Bottom Layer w10: v1(1190,1270) 1250,1330 1250,1610 1295,1655 1580,1655 1660,1735 v1(1660,2175)
NetU1_15: U1.15 U41.4 | length 755
  Top Layer w10: v1(1225,1960) 1255.79,1990.79 U1.15 ; v1(1590,2215) 1590,2275 1595,2280 U41.4
  Bottom Layer w10: v1(1225,1960) 1225,2135 1260,2170 1545,2170 v1(1590,2215)
NetU1_17: U1.17 U41.2 | length 1077.1
  Top Layer w10: v1@1225,1900 1295,1900 1311.1,1916.1 U1.17 ; v1(1545,2420) 1585,2380 U41.2
  Bottom Layer w10: v1(1225,1890) 1189,1926 1189,2121.63 1253.37,2186 1516.91,2186 1541,2210.09 1541,2246 1545,2250 v1(1545,2420)
pads on no net: L11. L12. U1.1 U1.3 U1.6 U1.9 U1.12 U1.16 U1.19 U1.20 U1.24 U1.27 U1.28 U1.29 U1.33 U11.1 U11.8 U21.3 U21.5 U21.8 U31.1 U32.1 U41.1 U41.8
copper on no net:
  other v2: 1336.69,1996.69 1380,1996.69 1423.31,1996.69 1336.69,2040 1380,2040 1423.31,2040 1336.69,2083.31 1380,2083.31 1423.31,2083.31

## Polygon pours and split planes (outlines as drawn)
GND on Bottom Layer "Bottom Layer-No Net" (solid, pour order 2): 10,2620 5,2615 5,5 3020,5 3020,2625 5,2625

## Other copper
Top Layer:
  rectangle net GND: 2430,1155 2540,1235
  rectangle net GND: 2460,190 2530,235
  rectangle net GND: 2415,195 2460,240
  text "Top" at 340,165 h40
Bottom Layer:
  rectangle net NetD11_A1: 1135,765 1355,1060
  rectangle net NetD11_A1: 1475,765 1695,1060
  rectangle net NetD13_A1: 1135,245 1355,545
  rectangle net NetD13_A1: 1460,240 1680,540
  rectangle net NetC13_2: 1920,1035 2105,1225
  rectangle net NetC13_2: 1920,825 2105,1015
  rectangle net NetC18_2: 1925,345 2110,535
  rectangle net NetC18_2: 1925,130 2110,320
  text "Bottom" at 530,115 h40

## Silkscreen, mask and mechanical layers (free items; w line width, h text height)
Top Overlay:
  text "MCI" at 580,1440 h85
  text "2014" at 830,1420 h60
  text "Maximum" at 575,1340 h60
  text "Powerpoint" at 575,1270 h60
  text "Tracker" at 575,1200 h60
Mechanical 1:
  the board outline again, w10

## Text inside footprints (layer, text, board x,y; h text height)
JTAG: Top Overlay "6" at 399.68,2275 h50; Top Overlay "5" at 399.68,2175 h50; Top Overlay "2" at 20,2285 h50; Top Overlay "1" at 35,2175 h50
U21: Top Overlay "*" at 460,2057 h50; Top Overlay "PN" at 660,2375 h50; Top Overlay "DEV" at 660,2375 h50; Top Overlay "VAL" at 660,2375 h50; Top Overlay "TOL" at 660,2375 h50; Mechanical 1 "*" at 460,2057 h50; Mechanical 1 "RefDes2" at 660,2375 h50